# EAGLE board CT_schematic (EAGLE 7.6.0)

Size 100 x 80 mm. Coordinates in mm from the lower left corner, seen from the top.
Outline: 0,0 100,0 100,80 0,80 0,0
Copper layers (1*16): Top 0.035mm / dielectric 1.5mm / Bottom 0.035mm
Design rules "default": minimum track width 10mil, minimum drill 24mil, track to track 8mil, track to pad 8mil, pad to pad 8mil, via to via 8mil, smd to smd 8mil, copper to edge 40mil, drill to drill 8mil, minimum pad ring 10mil, minimum via ring 8mil, stop-mask expansion 4mil, vias tented up to drill 0mil, thermal gap 10mil

## Footprints (pad centres in the part's own frame; a part is rotated, then mirrored left to right if it is on the bottom)
C0603 = smd 0.8 x 0.8: 1 -0.762,0; 2 0.762,0
C0402 = smd 0.5 x 0.5: 1 -0.508,0; 2 0.508,0
C0805 = smd 1.2 x 1.3: 1 -1.016,0; 2 1.016,0
C1206 = smd 1.3 x 1.6: 1 -1.524,0; 2 1.524,0
L0603 = smd 0.8 x 0.8: 1 -0.762,0; 2 0.762,0
L0806 = smd 1.016 x 1.524: 1 -0.889,0; 2 0.889,0
R0603 = smd 0.8 x 0.8: 1 -0.762,0; 2 0.762,0
UFQFPN48 = smd 0.559 x 0.305: 1 -3.375,2.751; 2 -3.375,2.251; 3 -3.375,1.75; 4 -3.375,1.25; 5 -3.375,0.75; 6 -3.375,0.25; 7 -3.375,-0.25; 8 -3.375,-0.75; 9 -3.375,-1.25; 10 -3.375,-1.75; 11 -3.375,-2.251; 12 -3.375,-2.751; 25 3.375,-2.751; 26 3.375,-2.251; 27 3.375,-1.75; 28 3.375,-1.25; 29 3.375,-0.75; 30 3.375,-0.25; 31 3.375,0.25; 32 3.375,0.75; 33 3.375,1.25; 34 3.375,1.75; 35 3.375,2.251; 36 3.375,2.751 | smd 0.305 x 0.559: 13 -2.751,-3.375; 14 -2.251,-3.375; 15 -1.75,-3.375; 16 -1.25,-3.375; 17 -0.75,-3.375; 18 -0.25,-3.375; 19 0.25,-3.375; 20 0.75,-3.375; 21 1.25,-3.375; 22 1.75,-3.375; 23 2.251,-3.375; 24 2.751,-3.375; 37 2.751,3.375; 38 2.251,3.375; 39 1.75,3.375; 40 1.25,3.375; 41 0.75,3.375; 42 0.25,3.375; 43 -0.25,3.375; 44 -0.75,3.375; 45 -1.25,3.375; 46 -1.75,3.375; 47 -2.251,3.375; 48 -2.751,3.375 | smd 5.588 x 5.588: 49 0,0
SOIC-8 = smd 1.6 x 0.6: 1 -2.7,1.905 | smd 1.55 x 0.6: 2 -2.7,0.635; 3 -2.7,-0.635; 4 -2.7,-1.905; 5 2.7,-1.905; 6 2.7,-0.635; 7 2.7,0.635; 8 2.7,1.905
TDFN-8/6MM = smd 0.3 x 0.75: 1 0,0; 2 0.5,0; 3 1,0; 4 1.5,0; 5 1.5,3; 6 1,3; 7 0.5,3; 8 0,3
VQFN-16 = smd 1.105 x 0.381: 1 -1.822,0.975; 2 -1.822,0.325; 3 -1.822,-0.325; 4 -1.822,-0.975; 9 1.822,-0.975; 10 1.822,-0.325; 11 1.822,0.325; 12 1.822,0.975 | smd 0.381 x 1.105: 5 -0.975,-1.822; 6 -0.325,-1.822; 7 0.325,-1.822; 8 0.975,-1.822; 13 0.975,1.822; 14 0.325,1.822; 15 -0.325,1.822; 16 -0.975,1.822
HTSS-105-01-G-D = drill 1 pad 1.8 square: 1 0,0 | drill 1 pad 1.8: 2 0,2.54; 3 2.54,0; 4 2.54,2.54; 5 5.08,0; 6 5.08,2.54; 7 7.62,0; 8 7.62,2.54; 9 10.16,0; 10 10.16,2.54
FCI_10118193-0001LF = smd 0.4 x 1.35: 1 -1.3,2.675; 2 -0.65,2.675; 3 0,2.675; 4 0.65,2.675; 5 1.3,2.675 | smd 1.6 x 1.4: 6 -3.2,2.45; 7 3.2,2.45 | smd 1.9 x 1.9: 8 -1.2,0; 9 1.2,0 | hole 0.5: -3.3,0; 3.3,0
SOT143B = smd 1 x 0.7: 1 -0.75,-1 | smd 0.6 x 0.7: 2 0.95,-1; 3 0.95,1; 4 -0.95,1
ABS07-32.768KHZ-7-T = smd 1.1 x 2.4: 1 -2.5,0; 2 0,0
ASFL1 = smd 1.7 x 1.5: 1 -1.27,-1.1; 2 1.27,-1.1; 3 1.27,1.1; 4 -1.27,1.1
TSOT-23-5 = smd 1.3 x 0.62: 1 -1.31,0.95; 2 -1.31,0; 3 -1.31,-0.95; 4 1.31,-0.95; 5 1.31,0.95
DFN8_2X3MC = smd 0.813 x 0.305: 1 -1.398,0.75; 2 -1.398,0.25; 3 -1.398,-0.25; 4 -1.398,-0.75; 5 1.398,-0.75; 6 1.398,-0.25; 7 1.398,0.25; 8 1.398,0.75 | smd 1.753 x 1.549: 9 0,0
JST-2-SMD = smd 1 x 4.6: 1 -1,-3.7; 2 1,-3.7 | smd 1.6 x 3.4: NC1 -3.4,1.5; NC2 3.4,1.5
SON-6 = smd 0.55 x 0.3: 1 -0.355,0.5 | smd 0.52 x 0.3: 2 -0.37,0; 3 -0.37,-0.5; 4 0.37,-0.5; 5 0.37,0; 6 0.37,0.5
SW_4-1437565-2 = smd 1.4 x 2.1: 1 -2.23,4.55; 2 -2.23,-4.55; 3 2.23,4.55; 4 2.23,-4.55
LGM67K-G1J2-24-Z = smd 0.8 x 1.4: A -2,0; C 0,0
NC7SZ125M5X = smd 1.3 x 0.7: 1 -1.3,0.95; 2 -1.3,0; 3 -1.3,-0.95; 4 1.3,-0.95; 5 1.3,0.95
DUMMY_PACKAGE_149 = drill 0.3: 1 0,-1; 2 1.5,-1; 3 3,-1

## Placement (x,y rotation side)
C1  1e-06  [C0603]  -52.07,46.99 0 top  (outside the outline)
C2  1e-07  [C0603]  -55.88,46.99 0 top  (outside the outline)
C3  1e-07  [C0603]  -59.69,46.99 0 top  (outside the outline)
C4  1e-07  [C0603]  -63.5,46.99 0 top  (outside the outline)
C5  1e-07  [C0603]  -15.24,52.07 0 top  (outside the outline)
C6  1e-07  [C0603]  -19.05,52.07 0 top  (outside the outline)
C7  4.7e-06  [C0603]  -44.45,46.99 0 top  (outside the outline)
C8  2.2e-06  [C0603]  -48.26,46.99 0 top  (outside the outline)
C9  1e-08  [C0603]  -22.86,52.07 0 top  (outside the outline)
C10  1e-06  [C0603]  -26.67,52.07 0 top  (outside the outline)
C11  1e-11  [C0402]  -26.67,57.15 0 top  (outside the outline)
C12  1e-11  [C0402]  -30.48,57.15 0 top  (outside the outline)
C13  1e-06  [C0603]  -30.48,52.07 0 top  (outside the outline)
C14  1e-08  [C0402]  -34.29,57.15 0 top  (outside the outline)
C15  1e-08  [C0402]  -38.1,57.15 0 top  (outside the outline)
C16  1e-08  [C0402]  -41.91,57.15 0 top  (outside the outline)
C17  1e-07  [C0402]  -45.72,57.15 0 top  (outside the outline)
C18  1e-07  [C0402]  -49.53,57.15 0 top  (outside the outline)
C19  1e-06  [C0603]  -34.29,52.07 0 top  (outside the outline)
C20  1e-08  [C0402]  -53.34,57.15 0 top  (outside the outline)
C21  1e-05  [C0805]  -60.96,34.29 0 top  (outside the outline)
C22  1e-05  [C0805]  -15.24,41.91 0 top  (outside the outline)
C23  1e-07  [C0402]  -57.15,57.15 0 top  (outside the outline)
C24  1e-05  [C1206]  -29.21,35.56 0 top  (outside the outline)
C25  1e-05  [C1206]  -35.56,35.56 0 top  (outside the outline)
C26  1e-08  [C0402]  -60.96,57.15 0 top  (outside the outline)
F1  240.0  [L0603]  -38.1,52.07 0 top  (outside the outline)
I1  3.3e-06  [L0806]  -41.91,35.56 0 top  (outside the outline)
R1  10000.0  [R0603]  -48.26,41.91 0 top  (outside the outline)
R2  1000.0  [R0603]  -41.91,52.07 0 top  (outside the outline)
R3  1600.5  [R0603]  -45.72,52.07 0 top  (outside the outline)
R4  4700.0  [R0603]  -49.53,52.07 0 top  (outside the outline)
R5  2200.0  [R0603]  -53.34,52.07 0 top  (outside the outline)
R6  2200.0  [R0603]  -57.15,52.07 0 top  (outside the outline)
R7  2200.0  [R0603]  -60.96,52.07 0 top  (outside the outline)
R8  2200.0  [R0603]  -15.24,57.15 0 top  (outside the outline)
R9  10000.0  [R0603]  -53.34,41.91 0 top  (outside the outline)
R10  10000.0  [R0603]  -58.42,41.91 0 top  (outside the outline)
R11  10000.0  [R0603]  -63.5,41.91 0 top  (outside the outline)
R12  10000.0  [R0603]  -15.24,46.99 0 top  (outside the outline)
R13  10000.0  [R0603]  -20.32,46.99 0 top  (outside the outline)
R14  10000.0  [R0603]  -25.4,46.99 0 top  (outside the outline)
R15  220000.0  [R0603]  -33.02,41.91 0 top  (outside the outline)
R16  1000000.0  [R0603]  -27.94,41.91 0 top  (outside the outline)
R17  10000.0  [R0603]  -30.48,46.99 0 top  (outside the outline)
R18  10000.0  [R0603]  -35.56,46.99 0 top  (outside the outline)
R19  9100.0  [R0603]  -19.05,57.15 0 top  (outside the outline)
R20  680000.0  [R0603]  -38.1,41.91 0 top  (outside the outline)
R21  120000.0  [R0603]  -43.18,41.91 0 top  (outside the outline)
R22  2000.0  [R0603]  -22.86,57.15 0 top  (outside the outline)
R23  10000.0  [R0603]  -40.64,46.99 0 top  (outside the outline)
U1  stm32f401CBU6  [UFQFPN48]  -60.96,16.51 0 top  (outside the outline)
U2  AT25040B-SSHL-T  [SOIC-8]  -52.07,17.78 0 top  (outside the outline)
U3  24AA04-I/MC  [TDFN-8/6MM]  -36.83,16.51 0 top  (outside the outline)
U4  24AA08T-I/MNY  [TDFN-8/6MM]  -24.13,16.51 0 top  (outside the outline)
U5  TSC2046IRGVR  [VQFN-16]  -48.26,34.29 0 top  (outside the outline)
U6  HTSS-105-01-G-D  [HTSS-105-01-G-D]  -62.23,3.81 0 top  (outside the outline)
U7  10118193-0001LF  [FCI_10118193-0001LF]  -35.56,26.67 0 top  (outside the outline)
U8  prtr5v0u2ax  [SOT143B]  -24.13,62.23 0 top  (outside the outline)
U9  ABS07-32.768KHZ-7-T  [ABS07-32.768KHZ-7-T]  -55.88,26.67 0 top  (outside the outline)
U10  ASFL1-25MHZ-NCS  [ASFL1]  -26.67,26.67 0 top  (outside the outline)
U11  ltc3406es5  [TSOT-23-5]  -20.32,40.64 0 top  (outside the outline)
U12  MCP73831T-2ACI/MC  [DFN8_2X3MC]  -39.37,60.96 0 top  (outside the outline)
U13  S2B-PH-SM4-TB(LF)(SN)  [JST-2-SMD]  -41.91,6.35 0 top  (outside the outline)
U14  TPS3895ADRYR  [SON-6]  -33.02,60.96 0 top  (outside the outline)
U15  4-1437565-2  [SW_4-1437565-2]  -27.94,6.35 0 top  (outside the outline)
U16  Q65110A2395  [LGM67K-G1J2-24-Z]  -17.78,35.56 0 top  (outside the outline)
U17  nc7sz125m5x  [NC7SZ125M5X]  -54.61,34.29 0 top  (outside the outline)
U18  Dummy  [DUMMY_PACKAGE_149]  -30.48,62.23 0 top  (outside the outline)

## Library data of the parts
C1-C26 F1 I1 R1-R23 U1-U18 = circuit_tree

## Nets
CLK_CRYSTAL_U1_3: C11.1 U1.3 U9.1
CLK_CRYSTAL_U1_4: C12.1 U1.4 U9.2
CLK_U1_5: U1.5 U10.3
GND: C1.2 C2.2 C3.2 C4.2 C5.2 C6.2 C7.2 C8.2 C9.2 C10.2 C11.2 C12.2 C13.2 C14.2 C15.2 C16.2 C17.2 C18.2 C19.2 C20.2 C21.2 C22.1 C22.2 C23.2 C24.2 C25.2 C26.2 R2.2 R9.2 R15.2 R19.2 R21.2 R22.2 U1.8 U1.23 U1.35 U1.47 U1.49 U2.4 U3.4 U4.4 U5.10 U6.9 U7.5 U7.6 U7.7 U7.8 U7.9 U8.1 U10.2 U11.2 U12.6 U12.9 U13.2 U14.2 U16.C U17.1 U17.3 U18.1
INPUT_USBPOWER_5V: C13.1 C24.1 R23.2 U1.30 U7.1 U8.4 U12.1 U12.2
NET_U1_7: R4.1 U1.7 U17.4
NET_U1_9: C9.1 C10.1 F1.1 U1.9
NET_U1_21: R7.1 U1.21 U3.6
NET_U1_22: C8.1 U1.22
NET_U1_39: R8.1 U1.39 U3.5
NET_U1_42: R5.1 U1.42 U4.6
NET_U1_43: R6.1 U1.43 U4.5
NET_U1_44: R9.1 U1.44
NET_U1_45: R3.1 U1.45 U16.A
NET_U1_46: R1.1 U1.46 U15.3 U15.4
NET_U2_3: R10.1 U2.3
NET_U2_7: R12.1 U2.7
NET_U5_15: R14.1 U5.15
NET_U6_3: U5.7 U6.3
NET_U6_4: U5.9 U6.4
NET_U6_5: U5.6 U6.5
NET_U6_6: U5.8 U6.6
NET_U11_1: U11.1
NET_U11_3: I1.1 U11.3
NET_U11_5: R15.1 R16.1 U11.5
NET_U11_ATNET_3: I1.2 R16.2
NET_U12_5: R23.1 U12.5
NET_U12_8: R22.1 U12.8
NET_U14_1: R18.1 R19.1 U14.1
NET_U14_3: R20.2 R21.1 U14.3
NET_U14_4: R17.1 U14.4 U17.2
NET_U15_1: R2.1 U15.1 U15.2
PROC_SPI1_MISO: U1.16 U5.16
PROC_SPI1_MOSI: U1.17 U5.2
PROC_SPI1_NSS: R13.1 U1.14 U5.3
PROC_SPI1_SCK: U1.15 U5.4
PROC_SPI2_MISO: U1.27 U2.2
PROC_SPI2_MOSI: U1.28 U2.5
PROC_SPI2_NSS: R11.1 U1.25 U2.1
PROC_SPI2_SCK: U1.26 U2.6
PROC_TIM1_CH2N: U1.18 U18.2
PROC_TIM1_CH3: U1.31 U18.3
PROC_USB_OTG_FS_DM: U1.32 U7.2 U8.3
PROC_USB_OTG_FS_DP: U1.33 U7.3 U8.2
VCC_S1_3V7: C21.1 C25.1 U11.4 U12.3 U12.4 U13.1
VCC_TIER1_3V3: C1.1 C2.1 C3.1 C4.1 C5.1 C6.1 C7.1 C14.1 C15.1 C16.1 C17.1 C18.1 C19.1 C20.1 C22.2 C23.1 C26.1 F1.2 I1.2 R1.2 R3.2 R4.2 R5.2 R6.2 R7.2 R8.2 R10.2 R11.2 R12.2 R13.2 R14.2 R16.2 R17.2 R18.2 R20.1 U1.1 U1.24 U1.36 U1.48 U2.8 U3.7 U3.8 U4.7 U4.8 U5.5 U5.14 U10.4 U14.6 U17.5

## Tracks (layer width: path | path; a pad name or v marks a point on that pad's centre or on a via)
CLK_CRYSTAL_U1_3  (2 unrouted)
CLK_CRYSTAL_U1_4  (2 unrouted)
CLK_U1_5  (1 unrouted)
GND  (58 unrouted)
INPUT_USBPOWER_5V  (7 unrouted)
NET_U1_7  (2 unrouted)
NET_U1_9  (3 unrouted)
NET_U1_21  (2 unrouted)
NET_U1_22  (1 unrouted)
NET_U1_39  (2 unrouted)
NET_U1_42  (2 unrouted)
NET_U1_43  (2 unrouted)
NET_U1_44  (1 unrouted)
NET_U1_45  (2 unrouted)
NET_U1_46  (3 unrouted)
NET_U2_3  (1 unrouted)
NET_U2_7  (1 unrouted)
NET_U5_15  (1 unrouted)
NET_U6_3  (1 unrouted)
NET_U6_4  (1 unrouted)
NET_U6_5  (1 unrouted)
NET_U6_6  (1 unrouted)
NET_U11_3  (1 unrouted)
NET_U11_5  (2 unrouted)
NET_U11_ATNET_3  (1 unrouted)
NET_U12_5  (1 unrouted)
NET_U12_8  (1 unrouted)
NET_U14_1  (2 unrouted)
NET_U14_3  (2 unrouted)
NET_U14_4  (2 unrouted)
NET_U15_1  (2 unrouted)
PROC_SPI1_MISO  (1 unrouted)
PROC_SPI1_MOSI  (1 unrouted)
PROC_SPI1_NSS  (2 unrouted)
PROC_SPI1_SCK  (1 unrouted)
PROC_SPI2_MISO  (1 unrouted)
PROC_SPI2_MOSI  (1 unrouted)
PROC_SPI2_NSS  (2 unrouted)
PROC_SPI2_SCK  (1 unrouted)
PROC_TIM1_CH2N  (1 unrouted)
PROC_TIM1_CH3  (1 unrouted)
PROC_USB_OTG_FS_DM  (2 unrouted)
PROC_USB_OTG_FS_DP  (2 unrouted)
VCC_S1_3V7  (5 unrouted)
VCC_TIER1_3V3  (48 unrouted)